# EAGLE board processing (EAGLE 6.5.0), part 1 of 2
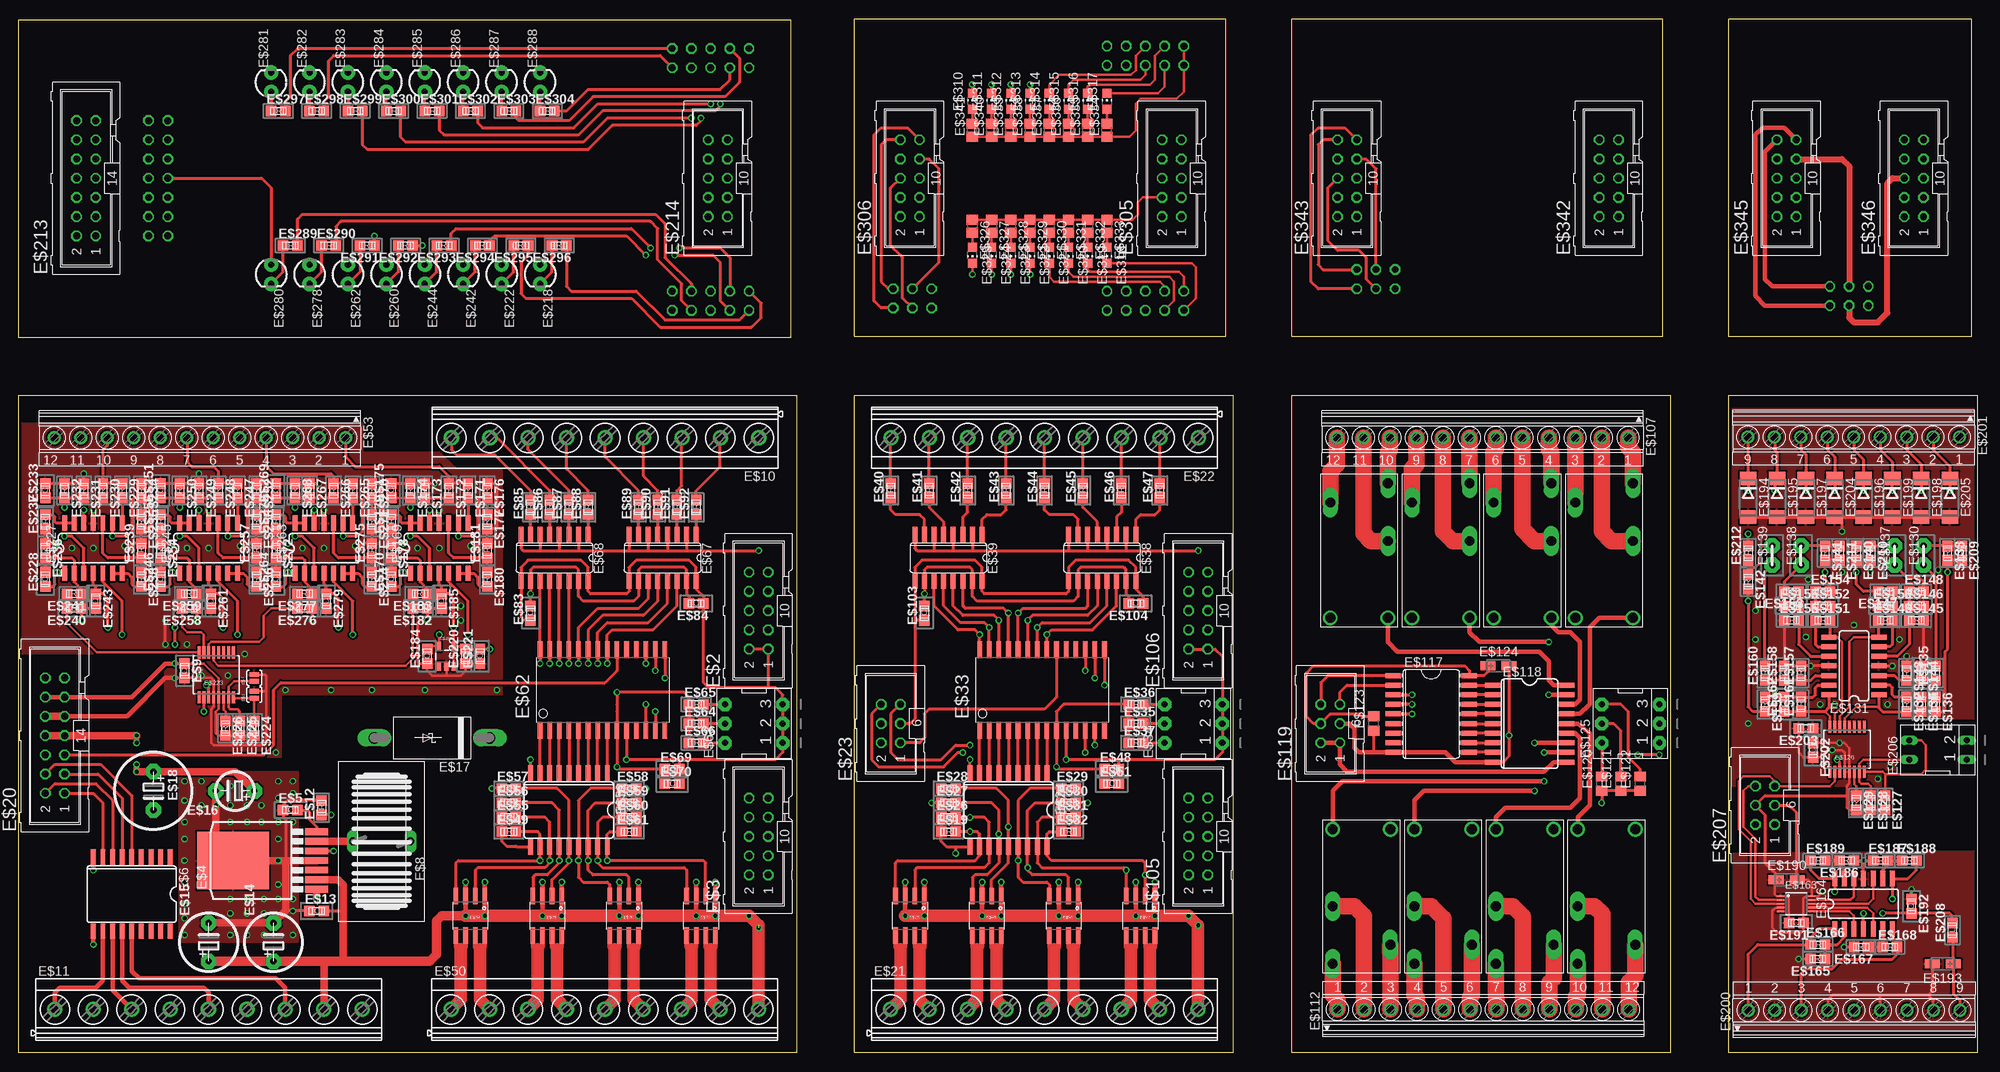
[diagram p0: board, top side]
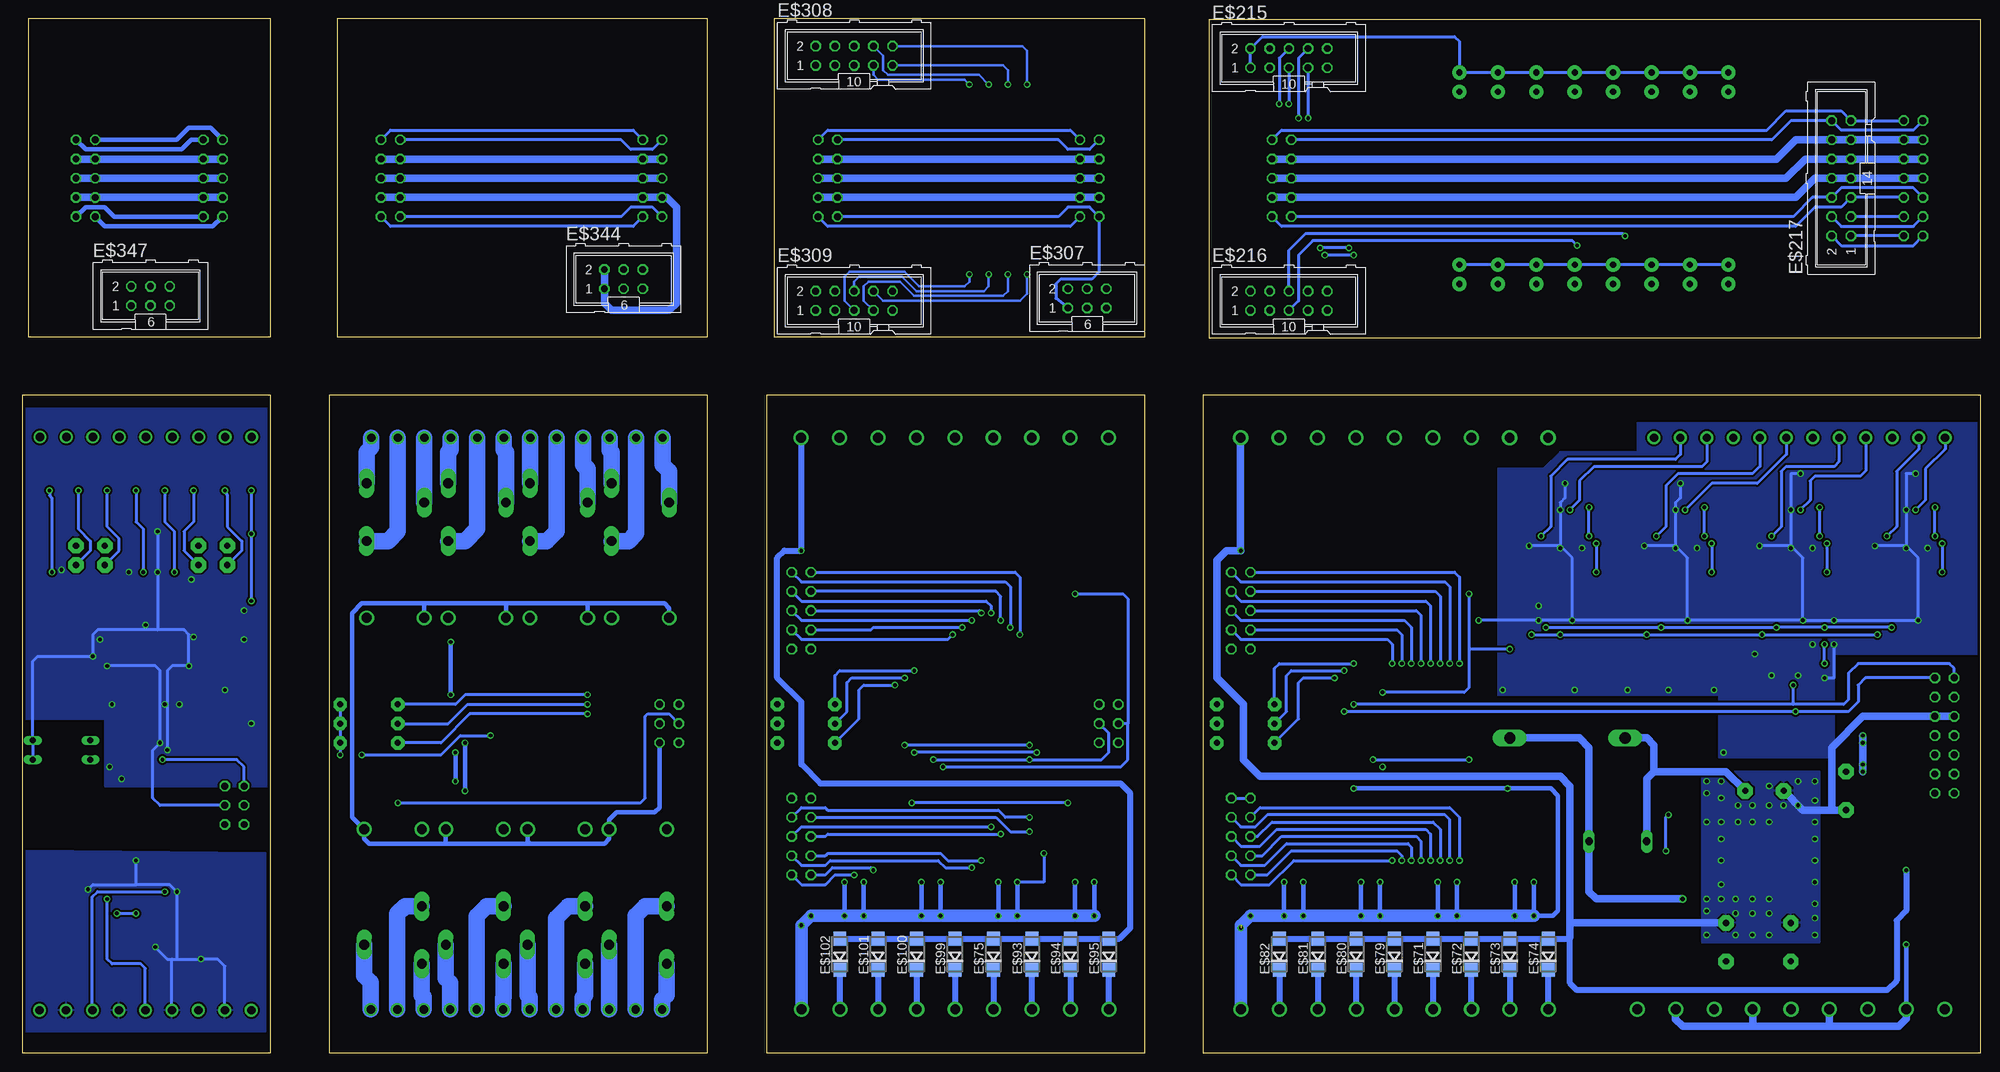
[diagram p1: board, bottom side, seen from below]

Size 258.85 x 136.63 mm. Coordinates in mm from the lower left corner, seen from the top.
Outline: 0,86.89 102.79,86.89 102.79,0 0,0 0,86.89
Outline: 110.49,86.89 160.5,86.89 160.5,0 110.49,0 110.49,86.89
Outline: 168.28,86.89 218.29,86.89 218.29,0 168.28,0 168.28,86.89
Outline: 226.06,86.89 258.85,86.89 258.85,0 226.06,0 226.06,86.89
Outline: 0,136.53 102.01,136.53 102.01,94.51 0,94.51 0,136.53
Outline: 110.49,136.63 159.49,136.63 159.49,94.61 110.49,94.61 110.49,136.63
Outline: 168.28,136.63 217.27,136.63 217.27,94.61 168.28,94.61 168.28,136.63
Outline: 226.06,94.61 226.06,136.63 258.06,136.63 258.06,94.61 226.06,94.61
Copper layers (1*16): Top 0.0356mm / dielectric 1.5011mm / Bottom 0.0356mm
Design rules "LaenPCBOrder": minimum track width 6mil, minimum drill 13mil, track to track 6mil, track to pad 6mil, pad to pad 6mil, via to via 6mil, smd to smd 6mil, copper to edge 15mil, drill to drill 6mil, minimum pad ring 7mil, minimum via ring 7mil, stop-mask expansion 3mil, vias tented up to drill 0mil, thermal gap 10mil

## Footprints (pad centres in the part's own frame; a part is rotated, then mirrored left to right if it is on the bottom)
SJ_2S-NO = smd 0.635 x 1.27: 1 -0.45,0; 2 0.45,0
ML10 = drill 0.914 octagon: 1 -5.08,-1.27; 2 -5.08,1.27; 3 -2.54,-1.27; 4 -2.54,1.27; 5 0,-1.27; 6 0,1.27; 7 2.54,-1.27; 8 2.54,1.27; 9 5.08,-1.27; 10 5.08,1.27
DDPACK-7 = smd 0.889 x 3.048: 1 -3.81,-8.255; 2 -2.54,-8.255; 3 -1.27,-8.255; 4 0,-8.255; 5 1.27,-8.255; 6 2.54,-8.255; 7 3.81,-8.255 | smd 7.62 x 9.525: P$1 0,2.794
C0805 = smd 1.397 x 1.397: 1 -0.953,0; 2 0.953,0
SO18L = smd 0.66 x 2.032: 1 -0.635,-4.902; 2 0.635,-4.902; 3 1.905,-4.902; 4 3.175,-4.902; 5 4.445,-4.902; 6 5.715,-4.902; 7 6.985,-4.902; 8 8.255,-4.902; 9 9.525,-4.902; 10 9.525,4.902; 11 8.255,4.902; 12 6.985,4.902; 13 5.715,4.902; 14 4.445,4.902; 15 3.175,4.902; 16 1.905,4.902; 17 0.635,4.902; 18 -0.635,4.902
KM3.0 = drill 1.016 long: 1 -3.81,0; 2 3.81,0
MKDSN1,5/9-5,08 = drill 1.3 pad 2: 1 -20.341,0.025; 2 -15.261,0.025; 3 -10.181,0.025; 4 -5.101,0.025; 5 -0.021,0.025; 6 5.059,0.025; 7 10.139,0.025; 8 15.219,0.025; 9 20.299,0.025
R0805 = smd 1.397 x 1.397: 1 -0.953,0; 2 0.953,0
CE02D = drill 0.813 pad 2.032 octagon: + -2.54,0; - 2.54,0
CE02C = drill 0.813 pad 2.032 octagon: + -2.54,0; - 2.54,0
DO201T15 = drill 1.499 long: A 7.62,0; C -7.62,0
CE02A = drill 0.813 pad 2.032 octagon: + -2.54,0; - 2.54,0
ML14 = drill 0.914 octagon: 1 -7.62,-1.27; 2 -7.62,1.27; 3 -5.08,-1.27; 4 -5.08,1.27; 5 -2.54,-1.27; 6 -2.54,1.27; 7 0,-1.27; 8 0,1.27; 9 2.54,-1.27; 10 2.54,1.27; 11 5.08,-1.27; 12 5.08,1.27; 13 7.62,-1.27; 14 7.62,1.27
ML6 = drill 0.914 octagon: 1 -2.54,-1.27; 2 -2.54,1.27; 3 0,-1.27; 4 0,1.27; 5 2.54,-1.27; 6 2.54,1.27
SOIC8 = smd 0.61 x 2.21: 1 -1.905,-2.616; 2 -0.635,-2.616; 3 0.635,-2.616; 4 1.905,-2.616; 5 1.905,2.616; 6 0.635,2.616; 7 -0.635,2.616; 8 -1.905,2.616
SO28-3 = smd 0.61 x 2.21: 1 -8.255,-5.315; 2 -6.985,-5.315; 3 -5.715,-5.315; 4 -4.445,-5.315; 5 -3.175,-5.315; 6 -1.905,-5.315; 7 -0.635,-5.315; 8 0.635,-5.315; 9 1.905,-5.315; 10 3.175,-5.315; 11 4.445,-5.315; 12 5.715,-5.315; 13 6.985,-5.315; 14 8.255,-5.315; 15 8.255,5.315; 16 6.985,5.315; 17 5.715,5.315; 18 4.445,5.315; 19 3.175,5.315; 20 1.905,5.315; 21 0.635,5.315; 22 -0.635,5.315; 23 -1.905,5.315; 24 -3.175,5.315; 25 -4.445,5.315; 26 -5.715,5.315; 27 -6.985,5.315; 28 -8.255,5.315
EPG-03-SMALL = drill 0.813 pad 1.778 octagon: 1 -2.54,-3.81; 2 0,-3.81; 3 2.54,-3.81; 4 2.54,3.81; 5 0,3.81; 6 -2.54,3.81
SO16 = smd 0.66 x 2.032: 1 -4.445,-3.073; 2 -3.175,-3.073; 3 -1.905,-3.073; 4 -0.635,-3.073; 5 0.635,-3.073; 6 1.905,-3.073; 7 3.175,-3.073; 8 4.445,-3.073; 9 4.445,3.073; 10 3.175,3.073; 11 1.905,3.073; 12 0.635,3.073; 13 -0.635,3.073; 14 -1.905,3.073; 15 -3.175,3.073; 16 -4.445,3.073
175317 = drill 1.1 pad 1.7: 1 -13.973,0; 2 -10.473,0; 3 -6.973,0; 4 -3.473,0; 5 0.028,0; 6 3.527,0; 7 7.027,0; 8 10.527,0; 9 14.027,0; 19 17.527,0; 20 21.027,0; 21 24.527,0
DO214AC = smd 1.8 x 1.7: A 2.05,0; C -2.05,0
ALQ = drill 1.3: P$1 0,3.81; P$2 0,-3.81 | drill 1.3 pad 1.676 long: P$3 10.16,-3.81; P$4 17.78,-3.81; P$5 15.24,3.81
SO18W = smd 0.66 x 2.032: 1 -5.08,-5.029; 2 -3.81,-5.029; 3 -2.54,-5.029; 4 -1.27,-5.029; 5 0,-5.029; 6 1.27,-5.029; 7 2.54,-5.029; 8 3.81,-5.029; 9 5.08,-5.029; 10 5.08,5.029; 11 3.81,5.029; 12 2.54,5.029; 13 1.27,5.029; 14 0,5.029; 15 -1.27,5.029; 16 -2.54,5.029; 17 -3.81,5.029; 18 -5.08,5.029
R0805' = smd 1.3 x 1.5: 1 -0.95,0; 2 0.95,0
CT3216 = smd 2 x 1.2: + -1.4,0; - 1.4,0
TSSOP16 = smd 0.4 x 1.6: 1 -2.225,-2.85; 2 -1.575,-2.85; 3 -0.925,-2.85; 4 -0.275,-2.85; 5 0.375,-2.85; 6 1.025,-2.85; 7 1.675,-2.85; 8 2.325,-2.85; 9 2.325,3.05; 10 1.675,3.05; 11 1.025,3.05; 12 0.375,3.05; 13 -0.275,3.05; 14 -0.925,3.05; 15 -1.575,3.05; 16 -2.225,3.05
J01N = drill 0.813 pad 2.032 octagon: 1 -1.27,0; 2 1.27,0
SOIC-14 = smd 0.66 x 2.032: 1 -4.445,-3.315; 2 -3.175,-3.315; 3 -1.905,-3.315; 4 -0.635,-3.315; 5 0.635,-3.315; 6 1.905,-3.315; 7 3.175,-3.315; 8 3.175,3.315; 9 1.905,3.315; 10 0.635,3.315; 11 -0.635,3.315; 12 -1.905,3.315; 13 -3.175,3.315; 14 -4.445,3.315
MSOP10 = smd 0.3 x 1: 1 -1,-2.05; 2 -0.5,-2.05; 3 0,-2.05; 4 0.5,-2.05; 5 1,-2.05; 6 1,2.05; 7 0.5,2.05; 8 0,2.05; 9 -0.5,2.05; 10 -1,2.05
DO214AA = smd 1.8 x 2.2: A 2.55,0; C -2.55,0
1751316 = drill 1.1 pad 1.7: 1 -13.973,-0.1; 2 -10.473,-0.1; 3 -6.973,-0.1; 4 -3.473,-0.1; 5 0.028,-0.1; 6 3.527,-0.1; 7 7.027,-0.1; 8 10.527,-0.1; 9 14.027,-0.1
EPG-02 = drill 0.813 long: 1 -1.27,-3.81; 2 1.27,-3.81; 3 1.27,3.81; 4 -1.27,3.81
L0805 = smd 1.397 x 1.397: 1 -0.953,0; 2 0.953,0
LED3MM = drill 0.813 pad 1.88: A -1.27,0; K 1.27,0
SOT23-5 = smd 0.55 x 1.2: 1 -0.95,-1.3; 2 0,-1.3; 3 0.95,-1.3; 4 0.95,1.3; 5 -0.95,1.3
CHIP-LED0805 = smd 1.2 x 1.2: A 0,-1.05; C 0,1.05
R0805'' = smd 1.3 x 1.5: 1 -0.85,0; 2 0.85,0

## Placement (x,y rotation side)
E$1  [SJ_2S-NO]  31.11,47.31 90 top
E$2  [ML10]  97.79,58.42 90 top
E$3  [ML10]  97.79,28.57 90 top
E$4  LM2673  [DDPACK-7]  31.11,25.4 90 top
E$5  100n  [C0805]  35.88,32.07 0 top
E$6  ULN2803  [SO18L]  19.37,20.95 180 top
E$7  [SJ_2S-NO]  31.11,49.53 90 top
E$8  [KM3.0]  47.94,27.94 180 top
E$9  100n  [C0805]  21.91,50.48 270 top
E$10  [MKDSN1,5/9-5,08]  77.47,81.28 180 top
E$11  [MKDSN1,5/9-5,08]  25.08,5.71 0 top
E$12  10K  [R0805]  40.01,32.38 90 top
E$13  100n  [C0805]  39.37,18.73 0 top
E$14  [CE02D]  33.66,14.61 90 top
E$15  [CE02D]  25.08,14.61 90 top
E$16  [CE02C]  28.57,34.61 180 top
E$17  [DO201T15]  54.61,41.59 180 top
E$18  [CE02A]  17.78,34.61 270 top
E$19  10K  [R0805]  122.87,29.21 0 top
E$20  [ML14]  4.76,41.91 90 top
E$21  [MKDSN1,5/9-5,08]  135.57,5.71 0 top
E$22  [MKDSN1,5/9-5,08]  135.57,81.28 180 top
E$23  [ML6]  115.25,43.5 90 top
E$24  ULN2803  [SO18L]  135.25,32.07 180 top
E$25  [SOIC8]  117.79,18.1 180 top
E$26  10K  [R0805]  122.87,31.11 0 top
E$27  10K  [R0805]  122.87,33.02 0 top
E$28  10K  [R0805]  122.87,34.92 0 top
E$29  10K  [R0805]  138.75,34.92 0 top
E$30  10K  [R0805]  138.75,33.02 0 top
E$31  10K  [R0805]  138.75,31.11 0 top
E$32  10K  [R0805]  138.75,29.21 0 top
E$33  MCP23017  [SO28-3]  135.25,47.94 0 top
E$34  [EPG-03-SMALL]  155.26,43.5 90 top
E$35  10K  [R0805]  147.64,43.5 0 top
E$36  10K  [R0805]  147.64,46.04 0 top
E$37  10K  [R0805]  147.64,40.96 0 top
E$38  ACSL-6400  [SO16]  143.19,65.41 180 top
E$39  ACSL-6400  [SO16]  122.87,65.41 180 top
E$40  1.30K  [R0805]  115.25,74.3 90 top
E$41  1.30K  [R0805]  120.33,74.3 90 top
E$42  1.30K  [R0805]  125.41,74.3 90 top
E$43  1.30K  [R0805]  130.49,74.3 90 top
E$44  1.30K  [R0805]  135.57,74.3 90 top
E$45  1.30K  [R0805]  140.65,74.3 90 top
E$46  1.30K  [R0805]  145.73,74.3 90 top
E$47  1.30K  [R0805]  150.81,74.3 90 top
E$48  100n  [C0805]  144.46,37.47 0 top
E$49  10K  [R0805]  64.77,29.21 0 top
E$50  [MKDSN1,5/9-5,08]  77.47,5.71 0 top
E$51  1u  [C0805]  144.46,35.56 0 top
E$52  ULN2803  [SO18L]  77.15,32.07 180 top
E$53  [175317]  29.21,81.28 180 top
E$54  [SOIC8]  59.69,18.1 180 top
E$55  10K  [R0805]  64.77,31.11 0 top
E$56  10K  [R0805]  64.77,33.02 0 top
E$57  10K  [R0805]  64.77,34.92 0 top
E$58  10K  [R0805]  80.64,34.92 0 top
E$59  10K  [R0805]  80.64,33.02 0 top
E$60  10K  [R0805]  80.64,31.11 0 top
E$61  10K  [R0805]  80.64,29.21 0 top
E$62  MCP23017  [SO28-3]  77.15,47.94 0 top
E$63  [EPG-03-SMALL]  97.16,43.5 90 top
E$64  10K  [R0805]  89.53,43.5 0 top
E$65  10K  [R0805]  89.53,46.04 0 top
E$66  10K  [R0805]  89.53,40.96 0 top
E$67  ACSL-6400  [SO16]  85.09,65.41 180 top
E$68  ACSL-6400  [SO16]  70.8,65.41 180 top
E$69  100n  [C0805]  86.36,37.47 0 top
E$70  1u  [C0805]  86.36,35.56 0 top
E$71  [DO214AC]  72.39,13.02 90 bottom
E$72  [DO214AC]  67.31,13.02 90 bottom
E$73  [DO214AC]  62.23,13.02 90 bottom
E$74  [DO214AC]  57.15,13.02 90 bottom
E$75  [DO214AC]  130.49,13.02 90 bottom
E$76  [SOIC8]  80.01,18.1 180 top
E$77  [SOIC8]  90.17,18.1 180 top
E$78  [SOIC8]  69.85,18.1 180 top
E$79  [DO214AC]  77.47,13.02 90 bottom
E$80  [DO214AC]  82.55,13.02 90 bottom
E$81  [DO214AC]  87.63,13.02 90 bottom
E$82  [DO214AC]  92.71,13.02 90 bottom
E$83  100n  [C0805]  67.63,58.1 90 top
E$84  100n  [C0805]  89.53,59.37 180 top
E$85  1.30K  [R0805]  67.63,72.07 90 top
E$86  1.30K  [R0805]  70.17,72.07 90 top
E$87  1.30K  [R0805]  72.71,72.07 90 top
E$88  1.30K  [R0805]  75.25,72.07 90 top
E$89  1.30K  [R0805]  81.92,72.07 90 top
E$90  1.30K  [R0805]  84.45,72.07 90 top
E$91  1.30K  [R0805]  87,72.07 90 top
E$92  1.30K  [R0805]  89.53,72.07 90 top
E$93  [DO214AC]  125.41,13.02 90 bottom
E$94  [DO214AC]  120.33,13.02 90 bottom
E$95  [DO214AC]  115.25,13.02 90 bottom
E$96  [SOIC8]  138.11,18.1 180 top
E$97  [SOIC8]  148.27,18.1 180 top
E$98  [SOIC8]  127.95,18.1 180 top
E$99  [DO214AC]  135.57,13.02 90 bottom
E$100  [DO214AC]  140.65,13.02 90 bottom
E$101  [DO214AC]  145.73,13.02 90 bottom
E$102  [DO214AC]  150.81,13.02 90 bottom
E$103  100n  [C0805]  119.7,58.1 90 top
E$104  100n  [C0805]  147.64,59.37 180 top
E$105  [ML10]  155.89,28.57 90 top
E$106  [ML10]  155.89,58.42 90 top
E$107  [175317]  198.75,81.28 180 top
E$108  ALQ105  [ALQ]  187.96,57.47 90 top
E$109  ALQ105  [ALQ]  177.16,57.47 90 top
E$110  ALQ105  [ALQ]  209.55,57.47 90 top
E$111  ALQ105  [ALQ]  198.75,57.47 90 top
E$112  [175317]  188.28,5.71 0 top
E$113  ALQ105  [ALQ]  199.07,29.53 270 top
E$114  ALQ105  [ALQ]  209.87,29.53 270 top
E$115  ALQ105  [ALQ]  177.48,29.53 270 top
E$116  ALQ105  [ALQ]  188.28,29.53 270 top
E$117  MCP2308  [SO18W]  186.69,44.77 270 top
E$118  ULN2803  [SO18L]  199.71,47.94 270 top
E$119  [ML6]  173.35,43.5 90 top
E$120  10K  [R0805']  209.23,35.56 90 top
E$121  10K  [R0805']  211.77,35.56 90 top
E$122  10K  [R0805']  214.31,35.56 90 top
E$123  100n  [R0805']  179.07,43.5 90 top
E$124  10u  [CT3216]  195.58,51.12 0 top
E$125  [EPG-03-SMALL]  213.04,43.5 90 top
E$126  ADC128D818  [TSSOP16]  241.62,40.01 0 top
E$127  10K  [R0805]  246.7,33.02 270 top
E$128  10K  [R0805]  244.79,33.02 270 top
E$129  10K  [R0805]  242.89,33.02 270 top
E$130  [J01N]  251.78,65.72 90 top
E$131  LMV344  [SOIC-14]  242.57,51.75 90 top
E$132  25.5K  [R0805]  249.56,46.04 270 top
E$133  500  [R0805]  254.95,66.04 270 top
E$134  100n  [C0805]  251.46,46.04 270 top
E$135  102K  [R0805]  253.37,50.16 90 top
E$136  102K  [R0805]  253.37,46.04 270 top
E$137  [J01N]  247.97,65.72 90 top
E$138  [J01N]  235.59,65.72 90 top
E$139  [J01N]  231.78,65.72 90 top
E$140  500  [R0805]  242.89,66.04 270 top
E$141  500  [R0805]  238.76,66.04 270 top
E$142  500  [R0805]  228.6,62.23 270 top
E$143  25.5K  [R0805]  249.56,50.16 270 top
E$144  100n  [C0805]  251.46,50.16 270 top
E$145  25.5K  [R0805]  250.82,57.15 0 top
E$146  100n  [C0805]  250.82,59.05 0 top
E$147  102K  [R0805]  246.7,60.96 180 top
E$148  102K  [R0805]  250.82,60.96 0 top
E$149  25.5K  [R0805]  246.7,57.15 0 top
E$150  100n  [C0805]  246.7,59.05 0 top
E$151  25.5K  [R0805]  238.44,57.15 0 top
E$152  100n  [C0805]  238.44,59.05 0 top
E$153  102K  [R0805]  234.31,60.96 180 top
E$154  102K  [R0805]  238.44,60.96 0 top
E$155  25.5K  [R0805]  234.31,57.15 0 top
E$156  100n  [C0805]  234.31,59.05 0 top
E$157  25.5K  [R0805]  235.59,50.16 90 top
E$158  100n  [C0805]  233.36,50.16 90 top
E$159  102K  [R0805]  230.82,46.04 270 top
E$160  102K  [R0805]  230.82,50.16 90 top
E$161  25.5K  [R0805]  235.59,46.04 90 top
E$162  100n  [C0805]  233.36,46.04 90 top
E$163  MCP4728  [MSOP10]  234.95,19.68 270 top
E$164  OPA4171  [SOIC-14]  244.47,19.68 0 top
E$165  82.5K  [R0805]  237.81,12.38 180 top
E$166  330K  [R0805]  237.81,14.29 0 top
E$167  82.5K  [R0805]  243.52,13.97 180 top
E$168  330K  [R0805]  247.33,13.97 0 top
E$169  [SOIC-14]  56.2,66.67 0 top
E$170  0.1  [C0805]  49.21,62.55 90 top
E$171  1K  [R0805]  59.37,74.3 270 top
E$172  2K  [R0805]  56.83,74.3 270 top
E$173  2K  [R0805]  53.66,74.3 270 top
E$174  39.2K  [R0805]  51.75,74.3 270 top
E$175  0.1  [C0805]  49.21,74.3 90 top
E$176  1.91K  [R0805]  61.91,74.3 270 top
E$177  100  [R0805]  61.91,70.17 270 top
E$178  39.2K  [R0805]  49.21,66.36 270 top
E$179  1K  [R0805]  49.21,70.17 90 top
E$180  26.7K  [R0805]  61.91,62.55 270 top
E$181  1.1K  [R0805]  61.91,66.36 90 top
E$182  4.7n  [C0805]  53.02,58.74 180 top
E$183  51  [R0805]  53.02,60.64 180 top
E$184  0.1  [C0805]  53.98,52.39 90 top
E$185  0.1  [C0805]  55.88,59.69 270 top
E$186  82.5K  [R0805]  241.62,25.4 180 top
E$187  82.5K  [R0805]  246.06,25.4 0 top
E$188  330K  [R0805]  249.87,25.4 0 top
E$189  330K  [R0805]  237.81,25.4 0 top
E$190  10u  [CT3216]  233.68,22.86 0 top
E$191  100n  [C0805]  234.95,17.14 180 top
E$192  100n  [C0805]  250.19,19.37 270 top
E$193  10u  [CT3216]  254.32,11.75 180 top
E$194  1SMB30AT3G  [DO214AA]  228.6,73.34 270 top
E$195  [DO214AA]  232.41,73.34 270 top
E$196  1SMB30AT3G  [DO214AA]  243.84,73.34 270 top
E$197  1SMB30AT3G  [DO214AA]  236.22,73.34 270 top
E$198  1SMB30AT3G  [DO214AA]  251.46,73.34 270 top
E$199  1SMB30AT3G  [DO214AA]  247.65,73.34 270 top
E$200  [1751316]  242.57,5.71 0 top
E$201  [1751316]  242.57,81.28 180 top
E$202  100n  [C0805]  237.17,40.01 270 top
E$203  1u  [C0805]  236.22,42.86 180 top
E$204  1SMB30AT3G  [DO214AA]  240.03,73.34 270 top
E$205  1SMB30AT3G  [DO214AA]  255.27,73.34 270 top
E$206  [EPG-02]  253.68,40.01 90 top
E$207  [ML6]  230.82,32.7 90 top
E$208  10uH  [L0805]  255.59,16.19 90 top
E$209  500  [R0805]  256.86,66.04 270 top
E$210  500  [R0805]  244.79,66.04 270 top
E$211  500  [R0805]  240.66,66.04 270 top
E$212  500  [R0805]  228.6,66.04 90 top
E$213  [ML14]  8.89,115.57 90 top
E$214  [ML10]  92.39,115.57 90 top
E$215  [ML10]  91.44,131.44 0 bottom
E$216  [ML10]  91.44,99.38 0 bottom
E$217  [ML14]  18.41,115.57 90 bottom
E$218  [LED3MM]  68.9,102.87 270 top
E$219  [SOT23-5]  56.52,52.39 0 top
E$220  0.1  [C0805]  59.05,52.39 90 top
E$221  0.1  [C0805]  60.96,52.39 90 top
E$222  [LED3MM]  63.82,102.87 270 top
E$223  AD5316R  [TSSOP16]  26.04,49.85 0 top
E$224  10K  [R0805]  31.11,42.86 270 top
E$225  10K  [R0805]  29.21,42.86 270 top
E$226  10K  [R0805]  27.3,42.86 270 top
E$227  [SOIC-14]  10.48,66.67 0 top
E$228  0.1  [C0805]  3.49,62.55 90 top
E$229  1K  [R0805]  13.65,74.3 270 top
E$230  2K  [R0805]  11.11,74.3 270 top
E$231  2K  [R0805]  8.57,74.3 270 top
E$232  39.2K  [R0805]  6.03,74.3 270 top
E$233  0.1  [C0805]  3.49,74.3 90 top
E$234  1.91K  [R0805]  16.19,74.3 270 top
E$235  100  [R0805]  16.19,70.17 270 top
E$236  39.2K  [R0805]  3.49,66.36 270 top
E$237  1K  [R0805]  3.49,70.17 90 top
E$238  26.7K  [R0805]  16.19,62.55 270 top
E$239  1.1K  [R0805]  16.19,66.36 90 top
E$240  4.7n  [C0805]  7.3,58.74 180 top
E$241  51  [R0805]  7.3,60.64 180 top
E$242  [LED3MM]  58.74,102.87 270 top
E$243  0.1  [C0805]  10.16,59.69 270 top
E$244  [LED3MM]  53.66,102.87 270 top
E$245  [SOIC-14]  25.72,66.67 0 top
E$246  0.1  [C0805]  18.73,62.55 90 top
E$247  1K  [R0805]  28.89,74.3 270 top
E$248  2K  [R0805]  26.35,74.3 270 top
E$249  2K  [R0805]  23.81,74.3 270 top
E$250  39.2K  [R0805]  21.27,74.3 270 top
E$251  0.1  [C0805]  18.73,74.3 90 top
E$252  1.91K  [R0805]  31.43,74.3 270 top
E$253  100  [R0805]  31.43,70.17 270 top
E$254  39.2K  [R0805]  18.73,66.36 270 top
E$255  1K  [R0805]  18.73,70.17 90 top
E$256  26.7K  [R0805]  31.43,62.55 270 top
E$257  1.1K  [R0805]  31.43,66.36 90 top
E$258  4.7n  [C0805]  22.54,58.74 180 top
E$259  51  [R0805]  22.54,60.64 180 top
E$260  [LED3MM]  48.58,102.87 270 top
E$261  0.1  [C0805]  25.4,59.69 270 top
E$262  [LED3MM]  43.5,102.87 270 top
E$263  [SOIC-14]  40.96,66.67 0 top
E$264  0.1  [C0805]  33.97,62.55 90 top
E$265  1K  [R0805]  44.13,74.3 270 top
E$266  2K  [R0805]  41.59,74.3 270 top
E$267  2K  [R0805]  38.42,74.3 270 top
E$268  39.2K  [R0805]  36.51,74.3 270 top
E$269  0.1  [C0805]  33.97,74.3 90 top
E$270  1.91K  [R0805]  46.67,74.3 270 top
E$271  100  [R0805]  46.67,70.17 270 top
E$272  39.2K  [R0805]  33.97,66.36 270 top
E$273  1K  [R0805]  33.97,70.17 90 top
E$274  26.7K  [R0805]  46.67,62.55 270 top
E$275  1.1K  [R0805]  46.67,66.36 90 top
E$276  4.7n  [C0805]  37.78,58.74 180 top
E$277  51  [R0805]  37.78,60.64 180 top
E$278  [LED3MM]  38.42,102.87 270 top
E$279  0.1  [C0805]  40.64,59.69 270 top
E$280  [LED3MM]  33.34,102.87 270 top
E$281  [LED3MM]  33.34,128.27 90 top
E$282  [LED3MM]  38.42,128.27 90 top
E$283  [LED3MM]  43.5,128.27 90 top
E$284  [LED3MM]  48.58,128.27 90 top
E$285  [LED3MM]  53.66,128.27 90 top
E$286  [LED3MM]  58.74,128.27 90 top
E$287  [LED3MM]  63.82,128.27 90 top
E$288  [LED3MM]  68.9,128.27 90 top
E$289  470  [R0805]  35.88,106.68 0 top
E$290  470  [R0805]  40.96,106.68 0 top
E$291  470  [R0805]  46.04,106.68 180 top
E$292  470  [R0805]  51.12,106.68 180 top
E$293  470  [R0805]  56.2,106.68 180 top
E$294  470  [R0805]  61.28,106.68 180 top
E$295  470  [R0805]  66.36,106.68 180 top
E$296  470  [R0805]  71.44,106.68 180 top
E$297  470  [R0805]  34.29,124.46 0 top
E$298  470  [R0805]  39.37,124.46 0 top
E$299  470  [R0805]  44.45,124.46 0 top
E$300  470  [R0805]  49.53,124.46 0 top
E$301  470  [R0805]  54.61,124.46 0 top
E$302  470  [R0805]  59.69,124.46 0 top
E$303  470  [R0805]  64.77,124.46 0 top
E$304  470  [R0805]  69.85,124.46 0 top
E$305  [ML10]  152.4,115.57 90 top
E$306  [ML10]  117.79,115.57 90 top
E$307  [ML6]  118.11,99.69 0 bottom
E$308  [ML10]  148.91,131.76 0 bottom
E$309  [ML10]  148.91,99.38 0 bottom
E$310  [CHIP-LED0805]  126.05,125.73 0 top
E$311  [CHIP-LED0805]  128.59,125.73 0 top
E$312  [CHIP-LED0805]  131.13,125.73 0 top
E$313  [CHIP-LED0805]  133.67,125.73 0 top
E$314  [CHIP-LED0805]  136.21,125.73 0 top
E$315  [CHIP-LED0805]  138.75,125.73 0 top
E$316  [CHIP-LED0805]  141.29,125.73 0 top
E$317  [CHIP-LED0805]  143.83,125.73 0 top
E$318  [CHIP-LED0805]  143.83,105.41 180 top
E$319  [CHIP-LED0805]  141.29,105.41 180 top
E$320  [CHIP-LED0805]  138.75,105.41 180 top
E$321  [CHIP-LED0805]  136.21,105.41 180 top
E$322  [CHIP-LED0805]  133.67,105.41 180 top
E$323  [CHIP-LED0805]  131.13,105.41 180 top
E$324  [CHIP-LED0805]  128.59,105.41 180 top
E$325  [CHIP-LED0805]  126.05,105.41 180 top
E$326  [R0805'']  126.05,109.22 270 top
E$327  [R0805'']  128.59,109.22 270 top
E$328  [R0805'']  131.13,109.22 270 top
E$329  [R0805'']  133.67,109.22 270 top
E$330  [R0805'']  136.21,109.22 270 top
E$331  [R0805'']  138.75,109.22 270 top
E$332  [R0805'']  141.29,109.22 270 top
E$333  [R0805'']  143.83,109.22 270 top
E$334  [R0805'']  143.83,121.92 90 top
E$335  [R0805'']  141.29,121.92 90 top
E$336  [R0805'']  138.75,121.92 90 top
E$337  [R0805'']  136.21,121.92 90 top
E$338  [R0805'']  133.67,121.92 90 top
E$339  [R0805'']  131.13,121.92 90 top
E$340  [R0805'']  128.59,121.92 90 top
E$341  [R0805'']  126.05,121.92 90 top
E$342  [ML10]  210.19,115.57 90 top
E$343  [ML10]  175.58,115.57 90 top
E$344  [ML6]  179.39,102.23 0 bottom
E$345  [ML10]  233.68,115.57 90 top
E$346  [ML10]  250.51,115.57 90 top
E$347  [ML6]  241.94,100.01 0 bottom

## Library data of the parts
E$1 E$7 = SparkFun-Capacitors
E$2 E$3 E$20 E$23 E$105 E$106 E$119 E$207 E$213-E$217 E$305-E$309 E$342-E$347 = con-harting-ml
E$4 = texas
E$5 E$9 E$12-E$16 E$18 E$19 E$26-E$32 E$35-E$37 E$40-E$49 E$51 E$55-E$61 E$64-E$66 E$69 E$70 E$83-E$92 E$103 E$104 E$127-E$129 E$132-E$136 E$140-E$162 E$165-E$168 E$170-E$189 E$191 E$192 E$202 E$203 E$208-E$212 E$220 E$221 E$224-E$226 E$228-E$241 E$243 E$246-E$259 E$261 E$264-E$277 E$279 E$289-E$304 = divers
E$6 E$24 E$52 E$118 = SparkFun-PowerIC
E$8 = inductors
E$10 E$11 E$21 E$22 E$50 = con-phoenix-508
E$17 = ref-packages-longpad
E$25 E$54 E$76-E$78 E$96-E$98 E$126 E$131 E$164 E$223 = SparkFun-AnalogIC
E$33 E$62 = burr-brown
E$34 E$63 E$125 E$206 = special
E$38 E$39 E$67 E$68 = linear
E$53 E$107 E$112 E$200 E$201 = con-phoenix-350
E$71-E$75 E$79-E$82 E$93-E$95 E$99-E$102 E$120-E$124 E$190 E$193-E$199 E$204 E$205 = ref-packages
E$108-E$111 E$113-E$116 = relay
E$117 = uln-udn
E$130 E$137-E$139 = connectors
E$163 E$169 E$219 E$227 E$245 E$263 = SparkFun-DigitalIC
E$218 E$222 E$242 E$244 E$260 E$262 E$278 E$280-E$288 = SparkFun-LED
E$310-E$325 = led
E$326-E$341 = resistor

## Nets
3V1: E$117.18 E$119.4 E$120.1 E$121.1 E$122.1 E$123.2 E$124.+
3V2: E$342.7 E$342.8 E$343.7 E$343.8 E$344.4
3V3: E$23.4 E$33.9 E$35.1 E$36.1 E$37.1 E$38.10 E$38.15 E$39.10 E$39.15 E$48.1 E$51.1 E$103.2 E$104.2
3V4: E$345.7 E$345.8 E$346.7 E$346.8 E$347.4
5V: E$108.P$1 E$109.P$1 E$110.P$1 E$111.P$1 E$113.P$1 E$114.P$1 E$115.P$1 E$116.P$1 E$118.10 E$119.1 E$119.2
5V1: E$345.3 E$345.4 E$346.3 E$346.4
+5V: E$4.6 E$8.2 E$16.+ E$17.A E$18.+ E$20.7 E$20.8
GND: E$1.2 E$2.1 E$2.2 E$4.4 E$4.P$1 E$5.1 E$6.9 E$7.2 E$9.2 E$10.1 E$12.2 E$13.1 E$14.- E$15.- E$16.- E$18.- E$20.9 E$20.10 E$52.9 E$62.10 E$63.1 E$63.2 E$63.3 E$67.2 E$67.4 E$67.6 E$67.8 E$67.9 E$67.16 E$68.2 E$68.4 E$68.6 E$68.8 E$68.9 E$68.16 E$69.2 E$70.2 E$71.A E$72.A E$73.A E$74.A E$79.A E$80.A E$81.A E$82.A E$83.1 E$84.1 E$169.11 E$173.1 E$174.1 E$175.2 E$176.1 E$177.2 E$181.2 E$182.1 E$184.1 E$185.2 E$219.2 E$220.1 E$221.1 E$223.4 E$227.11 E$231.1 E$232.1 E$233.2 E$234.1 E$235.2 E$239.2 E$240.1 E$243.2 E$245.11 E$249.1 E$250.1 E$251.2 E$252.1 E$253.2 E$257.2 E$258.1 E$261.2 E$263.11 E$267.1 E$268.1 E$269.2 E$270.1 E$271.2 E$275.2 E$276.1 E$279.2
GND1: E$23.3 E$24.9 E$33.10 E$34.1 E$34.2 E$34.3 E$38.9 E$38.16 E$39.9 E$39.16 E$48.2 E$51.2 E$103.1 E$104.1 E$106.1 E$106.2
GND2: E$117.9 E$118.9 E$119.3 E$123.1 E$124.- E$125.1 E$125.2 E$125.3
GND3: E$126.4 E$126.5 E$127.2 E$128.2 E$129.2 E$131.4 E$131.11 E$143.1 E$144.1 E$145.2 E$146.2 E$155.1 E$156.1 E$157.2 E$158.2 E$163.1 E$163.4 E$163.10 E$164.11 E$165.2 E$167.2 E$186.1 E$187.1 E$190.+ E$190.- E$191.1 E$191.2 E$192.1 E$193.- E$194.A E$195.A E$196.A E$197.A E$198.A E$199.A E$200.2 E$200.4 E$200.6 E$200.8 E$202.1 E$202.2 E$203.1 E$203.2 E$204.A E$205.A E$206.1 E$206.2 E$207.3 E$207.4
GND4: E$342.5 E$342.6 E$343.5 E$343.6 E$344.3
GND5: E$345.5 E$345.6 E$346.5 E$346.6 E$347.3
IN1+: E$139.1 E$160.2 E$195.C E$201.8
IN1-: E$142.2 E$159.2 E$194.C E$201.9 E$212.2
IN2+: E$138.1 E$153.2 E$197.C E$201.7
IN2-: E$141.2 E$154.2 E$201.6 E$204.C E$211.2
IN3+: E$137.1 E$148.2 E$199.C E$201.4
IN3-: E$140.2 E$147.2 E$196.C E$201.5 E$210.2
IN4+: E$130.1 E$135.2 E$198.C E$201.3
IN4-: E$133.2 E$136.2 E$201.2 E$205.C E$209.2
INT1: E$23.1 E$33.20
POWER_GND: E$22.1 E$38.2 E$38.4 E$38.6 E$38.8 E$39.2 E$39.4 E$39.6 E$39.8 E$75.A E$93.A E$94.A E$95.A E$99.A E$100.A E$101.A E$102.A
S$8: E$10.9 E$85.2
S$11: E$53.1 E$171.1 E$172.1
S$26: E$6.11 E$11.1
S$27: E$6.12 E$11.3
S$28: E$6.13 E$11.5
S$29: E$6.14 E$11.7
S$34: E$1.1 E$223.8 E$224.1
S$35: E$6.6 E$20.3
S$36: E$6.5 E$20.4
S$37: E$6.7 E$20.2
S$38: E$6.8 E$20.1
S$39: E$10.8 E$86.2
S$40: E$10.7 E$87.2
S$41: E$10.6 E$88.2
S$42: E$10.5 E$89.2
S$43: E$10.4 E$90.2
S$44: E$10.3 E$91.2
S$45: E$10.2 E$92.2
S$46: E$68.7 E$85.1
S$81: E$4.2 E$6.10 E$11.2 E$11.4 E$11.6 E$11.8 E$13.2 E$14.+ E$15.+ E$49.1 E$50.9 E$52.10 E$54.1 E$54.3 E$55.1 E$56.1 E$57.1 E$58.2 E$59.2 E$60.2 E$61.2 E$76.1 E$76.3 E$77.1 E$77.3 E$78.1 E$78.3
S$82: E$4.1 E$8.1 E$17.C
S$83: E$4.7 E$5.2
S$85: E$4.5 E$12.1
S$99: E$169.8 E$171.2
S$102: E$169.6 E$169.7 E$180.2
S$105: E$53.2 E$169.9 E$176.2 E$177.1
S$108: E$169.1 E$170.1 E$178.1 E$179.1
S$114: E$169.2 E$170.2 E$178.2 E$183.1
S$120: E$169.13 E$169.14 E$179.2
S$126: E$169.10 E$180.1 E$181.1
S$132: E$169.3 E$172.2 E$173.2 E$174.2 E$175.1
S$133: E$53.3 E$169.12
S$134: E$182.2 E$183.2 E$223.13
S$145: E$3.9 E$3.10
S$151: E$169.5 E$184.2 E$219.5 E$227.5 E$245.5 E$263.5
S$152: E$3.8 E$49.2 E$52.11 E$54.4
S$153: E$3.7 E$52.12 E$54.2 E$55.2
S$155: E$19.2 E$24.11 E$25.4 E$105.8
S$156: E$24.12 E$25.2 E$26.2 E$105.7
S$157: E$24.13 E$27.2 E$98.4 E$105.6
S$158: E$3.6 E$52.13 E$56.2 E$78.4
S$159: E$3.5 E$52.14 E$57.2 E$78.2
S$160: E$3.4 E$52.15 E$58.1 E$76.4
S$162: E$3.3 E$52.16 E$59.1 E$76.2
S$163: E$3.2 E$52.17 E$60.1 E$77.4
S$164: E$3.1 E$52.18 E$61.1 E$77.2
S$165: E$24.14 E$28.2 E$98.2 E$105.5
S$166: E$52.8 E$62.1
S$167: E$52.7 E$62.2
S$168: E$52.6 E$62.3
S$169: E$52.5 E$62.4
S$170: E$52.4 E$62.5
S$171: E$52.3 E$62.6
S$172: E$52.2 E$62.7
S$173: E$52.1 E$62.8
S$174: E$24.15 E$29.1 E$96.4 E$105.4
S$178: E$24.16 E$30.1 E$96.2 E$105.3
S$180: E$24.17 E$31.1 E$97.4 E$105.2
S$182: E$2.10 E$62.28 E$68.11
S$183: E$2.9 E$62.27 E$68.12
S$184: E$2.8 E$62.26 E$68.13
S$185: E$2.7 E$62.25 E$68.14
S$186: E$2.6 E$62.24 E$67.11
S$187: E$2.5 E$62.23 E$67.12
S$188: E$2.4 E$62.22 E$67.13
S$189: E$2.3 E$62.21 E$67.14
S$190: E$20.5 E$62.20
S$191: E$62.17 E$63.4 E$65.2
S$192: E$62.16 E$63.5 E$64.2
S$193: E$62.15 E$63.6 E$66.2
S$194: E$50.1 E$54.5 E$54.6 E$74.C
S$195: E$53.19 E$229.1 E$230.1
S$196: E$227.8 E$229.2
S$197: E$227.6 E$227.7 E$238.2
S$198: E$53.20 E$227.9 E$234.2 E$235.1
S$199: E$227.1 E$228.1 E$236.1 E$237.1
S$200: E$227.2 E$228.2 E$236.2 E$241.1
S$201: E$227.13 E$227.14 E$237.2
S$202: E$227.10 E$238.1 E$239.1
S$203: E$50.2 E$54.7 E$54.8 E$73.C
S$204: E$227.3 E$230.2 E$231.2 E$232.2 E$233.1
S$205: E$53.21 E$227.12
S$206: E$223.16 E$240.2 E$241.2
S$207: E$50.5 E$76.5 E$76.6 E$79.C
S$208: E$50.6 E$76.7 E$76.8 E$80.C
S$209: E$53.7 E$247.1 E$248.1
S$210: E$245.8 E$247.2
S$211: E$245.6 E$245.7 E$256.2
S$212: E$53.8 E$245.9 E$252.2 E$253.1
S$213: E$245.1 E$246.1 E$254.1 E$255.1
S$214: E$245.2 E$246.2 E$254.2 E$259.1
S$215: E$245.13 E$245.14 E$255.2
S$216: E$245.10 E$256.1 E$257.1
S$217: E$50.7 E$77.5 E$77.6 E$81.C
S$218: E$245.3 E$248.2 E$249.2 E$250.2 E$251.1
S$219: E$53.9 E$245.12
S$220: E$223.15 E$258.2 E$259.2
S$221: E$50.8 E$77.7 E$77.8 E$82.C
S$222: E$50.3 E$72.C E$78.5 E$78.6
S$223: E$53.4 E$265.1 E$266.1
S$224: E$263.8 E$265.2
S$225: E$263.6 E$263.7 E$274.2
S$226: E$53.5 E$263.9 E$270.2 E$271.1
S$227: E$263.1 E$264.1 E$272.1 E$273.1
S$228: E$263.2 E$264.2 E$272.2 E$277.1
S$229: E$263.13 E$263.14 E$273.2
S$230: E$263.10 E$274.1 E$275.1
S$231: E$223.6 E$226.1
S$232: E$263.3 E$266.2 E$267.2 E$268.2 E$269.1
S$233: E$53.6 E$263.12
S$234: E$223.14 E$276.2 E$277.2
S$235: E$7.1 E$223.7 E$225.1
S$236: E$50.4 E$71.C E$78.7 E$78.8
S$237: E$24.18 E$32.1 E$97.2 E$105.1
S$238: E$19.1 E$21.9 E$24.10 E$25.1 E$25.3 E$26.1 E$27.1 E$28.1 E$29.2 E$30.2 E$31.2 E$32.2 E$96.1 E$96.3 E$97.1 E$97.3 E$98.1 E$98.3
S$239: E$24.8 E$33.1
S$240: E$68.5 E$86.1
S$241: E$68.3 E$87.1
S$242: E$68.1 E$88.1
S$243: E$67.7 E$89.1
S$244: E$67.5 E$90.1
S$245: E$67.3 E$91.1
S$246: E$67.1 E$92.1
S$247: E$24.7 E$33.2
S$248: E$24.6 E$33.3
S$249: E$24.5 E$33.4
S$250: E$24.4 E$33.5
S$251: E$24.3 E$33.6
S$252: E$24.2 E$33.7
S$253: E$24.1 E$33.8
S$255: E$22.9 E$40.2
S$256: E$22.8 E$41.2
S$257: E$22.7 E$42.2
S$258: E$22.6 E$43.2
S$259: E$22.5 E$44.2
S$260: E$22.4 E$45.2
S$261: E$22.3 E$46.2
S$262: E$22.2 E$47.2
S$263: E$33.28 E$39.11 E$106.10
S$264: E$33.27 E$39.12 E$106.9
S$265: E$33.26 E$39.13 E$106.8
S$266: E$33.25 E$39.14 E$106.7
S$267: E$33.24 E$38.11 E$106.6
S$268: E$33.23 E$38.12 E$106.5
S$269: E$33.22 E$38.13 E$106.4
S$270: E$33.21 E$38.14 E$106.3
S$271: E$33.17 E$34.4 E$36.2
S$272: E$33.16 E$34.5 E$35.2
S$273: E$33.15 E$34.6 E$37.2
S$274: E$21.1 E$25.5 E$25.6 E$95.C
S$275: E$21.2 E$25.7 E$25.8 E$94.C
S$276: E$21.5 E$96.5 E$96.6 E$99.C
S$277: E$21.6 E$96.7 E$96.8 E$100.C
S$278: E$21.7 E$97.5 E$97.6 E$101.C
S$279: E$21.8 E$97.7 E$97.8 E$102.C
S$280: E$21.3 E$93.C E$98.5 E$98.6
S$281: E$21.4 E$75.C E$98.7 E$98.8
S$283: E$39.7 E$40.1
S$284: E$39.5 E$41.1
S$285: E$39.3 E$42.1
S$286: E$39.1 E$43.1
S$287: E$38.7 E$44.1
S$288: E$38.5 E$45.1
S$289: E$38.3 E$46.1
S$290: E$38.1 E$47.1
S$313: E$107.21 E$109.P$5
S$314: E$107.20 E$109.P$3
S$315: E$107.19 E$109.P$4
S$316: E$107.8 E$108.P$3
S$317: E$107.6 E$111.P$5
S$318: E$107.5 E$111.P$3
S$319: E$107.3 E$110.P$5
S$320: E$107.2 E$110.P$3
S$321: E$107.9 E$108.P$5
S$322: E$107.7 E$108.P$4
S$323: E$107.4 E$111.P$4
S$324: E$107.1 E$110.P$4
S$337: E$112.21 E$114.P$5
S$338: E$112.20 E$114.P$3
S$339: E$112.19 E$114.P$4
S$340: E$112.8 E$113.P$3
S$341: E$112.6 E$116.P$5
S$342: E$112.5 E$116.P$3
S$343: E$112.3 E$115.P$5
S$344: E$112.2 E$115.P$3
S$345: E$112.9 E$113.P$5
S$346: E$112.7 E$113.P$4
S$347: E$112.4 E$116.P$4
S$348: E$112.1 E$115.P$4
S$361: E$117.17 E$118.1
S$362: E$117.16 E$118.2
S$363: E$117.15 E$118.3
S$364: E$117.14 E$118.4
S$365: E$117.13 E$118.5
S$366: E$117.12 E$118.6
S$367: E$117.11 E$118.7
S$368: E$117.10 E$118.8
S$369: E$109.P$2 E$118.18
S$370: E$108.P$2 E$118.17
S$371: E$111.P$2 E$118.16
S$372: E$110.P$2 E$118.15
S$373: E$114.P$2 E$118.14
S$374: E$113.P$2 E$118.13
S$375: E$116.P$2 E$118.12
S$376: E$115.P$2 E$118.11
S$377: E$117.3 E$122.2 E$125.4
S$378: E$117.4 E$121.2 E$125.5
S$379: E$117.5 E$120.2 E$125.6
S$402: E$126.6 E$129.1
S$403: E$126.7 E$128.1 E$206.4
S$404: E$126.8 E$127.1 E$206.3
S$405: E$130.2 E$133.1 E$209.1
S$406: E$131.2 E$132.1 E$134.1 E$136.1
S$407: E$131.6 E$147.1 E$149.2 E$150.2
S$408: E$126.13 E$131.1 E$132.2 E$134.2
S$409: E$131.5 E$145.1 E$146.1 E$148.1
S$410: E$138.2 E$141.1 E$211.1
S$411: E$137.2 E$140.1 E$210.1
S$412: E$131.3 E$135.1 E$143.2 E$144.2
S$413: E$126.14 E$131.7 E$149.1 E$150.1
S$414: E$131.9 E$151.1 E$152.1 E$154.1
S$415: E$131.13 E$159.1 E$161.2 E$162.2
S$416: E$126.15 E$131.8 E$151.2 E$152.2
S$417: E$131.12 E$157.1 E$158.1 E$160.1
S$418: E$131.10 E$153.1 E$155.2 E$156.2
S$419: E$126.16 E$131.14 E$161.1 E$162.1
S$420: E$163.6 E$164.3
S$421: E$163.7 E$164.5
S$422: E$163.9 E$164.12
S$423: E$163.8 E$164.10
S$424: E$164.2 E$165.1 E$166.2
S$425: E$164.1 E$166.1 E$200.1
S$426: E$164.7 E$168.2 E$200.3
S$427: E$164.13 E$186.2 E$189.2
S$428: E$164.9 E$187.2 E$188.1
S$429: E$164.14 E$189.1 E$200.7
S$430: E$164.8 E$188.2 E$200.5
S$432: E$139.2 E$142.1 E$212.1
S$433: E$126.2 E$163.3 E$207.5
S$434: E$164.6 E$167.1 E$168.1
S$435: E$193.+ E$200.9 E$208.1
S$509: E$213.11 E$213.12 E$214.7 E$214.8 E$217.11 E$217.12
S$510: E$213.9 E$213.10 E$214.5 E$214.6 E$217.9 E$217.10
S$511: E$213.6 E$214.2 E$217.6
S$512: E$213.5 E$214.1 E$217.5
S$513: E$213.4 E$217.4
S$514: E$213.3 E$217.3
S$515: E$213.2 E$217.2
S$516: E$213.1 E$217.1
S$517: E$213.7 E$213.8 E$214.3 E$214.4 E$217.7 E$217.8 E$218.A E$222.A E$242.A E$244.A E$260.A E$262.A E$278.A E$280.A
S$518: E$280.K E$289.1
S$519: E$216.8 E$289.2
S$520: E$278.K E$290.1
S$521: E$216.7 E$290.2
S$522: E$262.K E$291.2
S$523: E$260.K E$292.2
S$524: E$216.6 E$291.1
S$525: E$216.5 E$292.1
S$526: E$216.4 E$293.1
S$527: E$216.3 E$294.1
S$528: E$216.2 E$295.1
S$529: E$216.1 E$296.1
S$530: E$244.K E$293.2
S$531: E$242.K E$294.2
S$532: E$222.K E$295.2
S$533: E$218.K E$296.2
S$534: E$215.10 E$297.2
S$535: E$215.9 E$298.2
S$536: E$215.8 E$299.2
S$537: E$215.7 E$300.2
S$538: E$215.6 E$301.2
S$539: E$215.5 E$302.2
S$540: E$215.4 E$303.2
S$541: E$215.3 E$304.2
S$542: E$215.1 E$215.2 E$281.K E$282.K E$283.K E$284.K E$285.K E$286.K E$287.K E$288.K
S$543: E$281.A E$297.1
S$544: E$282.A E$298.1
S$545: E$283.A E$299.1
S$546: E$284.A E$300.1
S$547: E$285.A E$301.1
S$548: E$286.A E$302.1
S$549: E$287.A E$303.1
S$550: E$288.A E$304.1
S$624: E$305.10 E$306.10 E$307.6
S$625: E$305.9 E$306.9 E$307.5
S$626: E$305.5 E$305.6 E$306.5 E$306.6 E$307.3
S$627: E$305.2 E$306.2 E$307.1
S$628: E$305.1 E$306.1
S$631: E$305.7 E$305.8 E$306.7 E$306.8 E$307.4
S$632: E$305.3 E$305.4 E$306.3 E$306.4 E$326.1 E$327.1 E$328.1 E$329.1 E$330.1 E$331.1 E$332.1 E$333.1
S$633: E$309.8 E$325.C
S$634: E$309.7 E$324.C
S$635: E$309.6 E$323.C
S$636: E$309.5 E$322.C
S$637: E$309.4 E$321.C
S$638: E$309.3 E$320.C
S$639: E$309.2 E$319.C
S$640: E$309.1 E$318.C
S$641: E$325.A E$326.2
S$642: E$324.A E$327.2
S$643: E$323.A E$328.2
S$644: E$322.A E$329.2
S$645: E$321.A E$330.2
S$646: E$320.A E$331.2
S$647: E$319.A E$332.2
S$648: E$318.A E$333.2
S$649: E$317.A E$334.2
S$650: E$316.A E$335.2
S$651: E$315.A E$336.2
S$652: E$314.A E$337.2
S$653: E$313.A E$338.2
S$654: E$312.A E$339.2
S$655: E$311.A E$340.2
S$656: E$310.A E$341.2
S$657: E$308.10 E$310.C
S$658: E$308.9 E$311.C
S$659: E$308.8 E$312.C
S$660: E$308.7 E$313.C
S$661: E$308.6 E$314.C
S$662: E$308.5 E$315.C
S$663: E$308.4 E$316.C
S$664: E$308.3 E$317.C
S$665: E$308.1 E$308.2 E$334.1 E$335.1 E$336.1 E$337.1 E$338.1 E$339.1 E$340.1 E$341.1
S$739: E$342.2 E$343.2
S$740: E$342.1 E$343.1
S$743: E$342.3 E$342.4 E$343.3 E$343.4 E$344.1 E$344.2
S$744: E$345.1 E$346.1
S$745: E$345.2 E$346.2
SCL: E$20.14 E$62.12 E$223.3
SCL1: E$23.6 E$33.12
SCL2: E$117.1 E$119.6
SCL3: E$126.3 E$163.2 E$207.6
SCL4: E$213.14 E$214.10 E$217.14
SCL5: E$342.10 E$343.10 E$344.6
SCL6: E$345.10 E$346.10 E$347.6
SDA: E$20.13 E$62.13 E$223.2
SDA1: E$23.5 E$33.13
SDA2: E$117.2 E$119.5
SDA3: E$213.13 E$214.9 E$217.13
SDA4: E$342.9 E$343.9 E$344.5
SDA5: E$345.9 E$346.9 E$347.5
VCC: E$9.1 E$20.11 E$20.12 E$62.9 E$64.1 E$65.1 E$66.1 E$67.10 E$67.15 E$68.10 E$68.15 E$69.1 E$70.1 E$83.2 E$84.2 E$169.4 E$185.1 E$219.3 E$219.4 E$220.2 E$221.2 E$223.5 E$224.2 E$225.2 E$226.2 E$227.4 E$243.1 E$245.4 E$261.1 E$263.4 E$279.1
VCC1: E$164.4 E$192.2 E$208.2

## Tracks (layer width: path | path; a pad name or v marks a point on that pad's centre or on a via)
3V1  (via drill 0.5)
  Top 0.406: E$122.1 E$121.1 E$120.1 v209.23,33.02 | E$124.+ 194.18,50.35 193.68,49.85 E$117.18 191.77,50.02 191.77,50.48 191.13,51.12 171.13,51.12 170.18,50.16 170.18,44.45 171.13,43.5 E$119.4 173.35,44.77 177.16,44.77 177.48,44.45 E$123.2
  Bottom 0.406: v209.23,33.02 177.16,33.02 176.53,33.66 176.53,44.45 176.21,44.77 173.35,44.77 E$119.4
3V2
  Top 0.406: E$344.4 179.39,116.84 178.12,118.11 E$343.7
  Bottom 1.016: E$342.7 E$342.8 E$343.7 E$343.8
3V3  (via drill 0.5)
  Top 0.406: E$51.1 E$48.1 137.48,37.47 v137.16,37.78 E$33.9 137.16,45.09 138.11,46.04 E$36.1 E$37.1 E$35.1 E$36.1 | E$103.2 v119.7,60.64 E$39.10 119.7,63.82 120.02,64.14 125.73,64.14 126.05,63.82 E$39.15 126.05,60.33 126.68,59.69 139.38,59.69 140.02,60.33 E$38.10 140.02,63.82 140.34,64.14 146.05,64.14 146.37,63.82 E$38.15 146.37,60.64 146.69,60.33 E$104.2
  Bottom 0.406: v137.16,37.78 113.67,37.78 112.71,38.73 112.71,43.5 | v119.7,60.64 113.35,60.64 112.71,60.01 112.71,43.5 | 112.71,43.5 E$23.4
3V4
  Top 0.813: E$345.7 240.98,118.11 241.94,117.16 E$347.4
  Bottom 1.016: E$345.8 E$345.7 E$346.8 E$346.7
5V
  Top 0.61: E$119.2 E$119.1 174.62,38.1 175.58,37.15 201.61,37.15 202.88,38.42 E$118.10
  Bottom 0.61: 191.77,27.62 181.93,27.62 181.29,28.26 E$115.P$1 181.29,30.8 180.34,31.75 175.26,31.75 174.62,32.38 E$119.1 | 191.77,27.62 202.88,27.62 | 202.88,27.62 213.04,27.62 213.68,28.26 E$114.P$1 215.26,31.11 215.26,58.1 214,59.37 205.74,59.37 | E$113.P$1 202.88,27.62 | E$116.P$1 192.09,27.94 191.77,27.62 | E$109.P$1 173.35,58.74 173.99,59.37 184.15,59.37 | 184.15,59.37 194.94,59.37 | 194.94,59.37 205.74,59.37 | E$108.P$1 184.15,59.37 | E$111.P$1 194.94,59.37 | E$110.P$1 205.74,59.37
5V1
  Bottom 1.016: E$345.4 E$345.3 E$346.4 E$346.3
+5V  (via drill 0.5)
  Top 0.813: v15.56,37.15 v15.56,38.1 | v15.56,40.96 v15.56,41.91
  Top 1.016: E$20.8 E$20.7 v15.56,41.91 | E$8.2 E$4.6 | E$16.+ 28.57,37.15 E$18.+ v15.56,37.15
  Bottom 1.016: E$16.+ 33.66,37.15 42.86,37.15 | 42.86,37.15 43.18,37.15 44.13,36.2 E$8.2 | E$17.A 44.13,41.59 43.18,40.64 43.18,37.47 42.86,37.15 | v15.56,41.91 v15.56,40.96 v15.56,38.1 v15.56,37.15
GND  (via drill 0.5)
  Top 0.305: E$221.1 E$220.1 | E$219.2 56.52,49.85 | 56.52,49.85 58.42,49.85 59.05,50.48 E$220.1 | E$220.1 | 56.52,49.85 54.61,49.85 53.98,50.48 E$184.1 53.02,51.44 52.7,51.75 52.7,56.83 53.02,57.15 v53.98,57.15 | v20.64,49.53 E$9.2 25.4,49.53 25.76,49.17 E$223.4 25.76,45.76 25.4,45.4 25.4,40.96 25.72,40.64 32.07,40.64 32.7,41.27 32.7,47.94 | 32.7,47.94 32.7,49.85 32.57,49.98 E$7.2 | E$1.2 32.52,47.76 32.7,47.94
  Top 0.406: E$251.2 E$250.1 E$249.1 v23.81,76.52 | v29.21,66.99 30.16,66.99 30.48,67.31 E$257.2 E$253.2 32.38,69.22 32.7,69.53 32.7,74.93 32.38,75.25 E$252.1 | v23.81,76.52 | E$245.11 v25.08,71.75 | v23.5,57.15 E$258.1 E$261.2 | E$269.2 E$268.1 E$267.1 39.05,75.25 v39.69,75.25 | v44.45,66.99 45.4,66.99 45.72,67.31 E$275.2 E$271.2 47.62,69.22 47.94,69.53 47.94,74.93 47.62,75.25 E$270.1 | E$263.11 v40.32,71.75 | v38.73,57.15 E$276.1 E$279.2 | E$175.2 E$174.1 E$173.1 54.29,75.25 v54.93,75.25 | v59.69,66.99 60.64,66.99 60.96,67.31 E$181.2 E$177.2 62.87,69.22 63.18,69.53 63.18,74.93 62.87,75.25 E$176.1 | E$169.11 v55.56,71.75 | v53.98,57.15 E$182.1 E$185.2 | E$233.2 E$232.1 E$231.1 v8.57,76.52 | v13.97,66.99 14.92,66.99 15.24,67.31 E$239.2 E$235.2 17.14,69.22 17.46,69.53 17.46,74.93 17.14,75.25 E$234.1 | v8.57,76.52 | E$227.11 v9.84,71.75 | v8.26,57.15 E$240.1 E$243.2 | v19.37,53.98 v19.37,57.15 | E$62.10 v80.33,38.73 87.31,38.73 | E$52.9 v67.63,38.73 | 87.31,38.73 100.01,38.73 100.97,39.69 E$63.1 E$63.2 E$63.3 100.97,47.31 100.01,48.26 99.06,48.26 | 87.31,38.73 E$69.2 E$70.2 | E$83.1 v66.36,57.15 E$68.9 66.36,64.14 67.31,65.09 74.3,65.09 75.25,64.14 E$68.16 75.25,60.96 75.56,60.64 80.33,60.64 80.64,60.96 E$67.9 80.64,64.14 81.6,65.09 88.58,65.09 89.53,64.14 E$67.16 89.53,61.28 90.49,60.33 E$84.1 90.49,48.9 91.12,48.26 99.06,48.26 | E$68.8 66.36,66.67 66.67,66.36 68.9,66.36 | E$68.6 68.9,66.36 | 68.9,66.36 71.44,66.36 | E$68.4 71.44,66.36 | 71.44,66.36 73.98,66.36 | E$68.2 73.98,66.36 | 73.98,66.36 80.64,66.36 | E$67.8 80.64,66.36 | 80.64,66.36 83.19,66.36 | E$67.6 83.19,66.36 | 83.19,66.36 85.72,66.36
  Top 0.406: E$67.4 85.72,66.36 | 85.72,66.36 88.27,66.36 | E$67.2 88.27,66.36 | 88.27,66.36 v97.79,66.36 | E$13.1 35.24,18.73 | E$2.2 E$2.1 99.06,48.26 | E$12.2 35.56,33.34 34.92,32.7 E$5.1 34.92,31.11 35.24,30.8 35.24,25.4 | E$221.1
  Top 0.61: E$20.9 14.29,44.45 19.37,49.53 v20.64,49.53 | E$6.9 v9.84,24.13
  Top 1.016: E$16.- 26.04,25.4 35.24,25.4 | E$4.4 35.24,25.4 | 35.24,25.4 35.24,18.73 E$14.- E$15.- | E$20.10 E$20.9
  Bottom 0.406: v23.81,76.52 25.08,76.52 v25.08,71.75 25.08,66.99 | 25.08,66.99 v29.21,66.99 | v23.5,57.15 23.5,65.41 25.08,66.99 | v39.69,75.25 39.69,73.34 40.32,72.71 v40.32,71.75 40.32,66.99 | 40.32,66.99 v44.45,66.99 | v38.73,57.15 38.73,65.41 40.32,66.99 | v23.5,57.15 v38.73,57.15 | v54.93,75.25 54.93,73.34 55.56,72.71 v55.56,71.75 55.56,66.99 | 55.56,66.99 v59.69,66.99 | v53.98,57.15 53.98,65.41 55.56,66.99 | v38.73,57.15 v53.98,57.15 | v8.57,76.52 9.84,76.52 v9.84,71.75 9.84,66.99 | 9.84,66.99 v13.97,66.99 | 9.84,66.99 8.26,65.41 v8.26,57.15 v19.37,57.15 v23.5,57.15 | v20.64,49.53 19.37,49.53 v19.37,53.98 | v80.33,38.73 v67.63,38.73 | v53.98,57.15 v66.36,57.15
  Bottom 0.813: 97.81,66.38 v97.79,66.36 | E$82.A E$81.A E$80.A E$79.A E$71.A E$72.A E$73.A E$74.A 54.47,15.07 54.29,15.24 54.29,9.21 53.34,8.26 12.38,8.26 11.11,9.53 11.11,17.46 9.84,18.73 v9.84,24.13
  Bottom 1.016: E$10.1 97.81,66.38 | v97.79,66.36 99.69,66.36 100.97,65.09 100.97,49.53 97.47,46.04 97.47,38.73 95.25,36.51 55.56,36.51 54.29,35.24 54.29,17.14 | E$16.- 23.5,32.07 19.68,32.07 | 19.68,32.07 E$18.- | E$14.- 54.29,17.14 | 54.29,17.14 54.29,15.24 | 19.68,32.07 19.68,40.32 15.56,44.45 E$20.9 E$20.10
  other vias: 6.99,66.67 22.23,66.67 37.47,66.67 52.7,66.67 58.42,59.05 58.42,57.15 22.23,53.98 29.84,52.7 27.62,49.85 24.13,49.85 9.84,66.67 25.08,66.67 40.32,66.67 55.56,66.67 33.97,39.69 35.24,47.94 63.18,47.94 53.66,47.94 46.67,47.94 41.27,47.94 34.29,30.48 34.29,28.26 34.29,25.4 34.29,22.23 34.29,20.32 32.38,20.32 30.16,20.32 27.94,20.32 27.94,30.48 30.16,32.7 30.16,30.48 32.07,30.48 32.07,32.7 27.94,18.41 30.16,15.56 30.16,18.41 27.94,15.56 21.91,19.68 21.91,17.78 21.91,15.56 27.94,32.7 27.94,35.24 34.29,33.66 34.29,35.88 36.2,35.88 36.2,34.29 26.04,32.7 24.13,32.7 21.91,33.34 36.2,15.56 36.2,20.32 36.2,18.73 21.91,25.4 21.91,22.54 21.91,28.26 21.91,30.48 21.91,35.88 24.13,35.88 36.2,30.48 32.38,15.56 32.38,18.41
  pour Top (isolate 0.254): 0,83.19 45.4,83.19 45.4,79.38 55.56,79.38 57.78,77.15 63.82,77.15 63.82,47.31 34.61,47.31 34.61,39.05 19.37,39.05 19.37,52.7 0,52.7
  pour Bottom (isolate 0.254): 0,83.19 45.4,83.19 45.4,79.38 55.56,79.38 57.78,77.15 63.82,77.15 63.82,47.31 34.61,47.31 34.61,39.05 19.37,39.05 19.37,52.7 0,52.7
  pour Top (isolate 0.254): 33.66,14.61 21.27,14.61 21.27,37.15 36.83,37.15 36.83,14.61
  pour Bottom (isolate 0.254): 33.66,14.61 21.27,14.61 21.27,37.15 36.83,37.15 36.83,14.61
GND1  (via drill 0.5)
  Top 0.406: E$33.10 v138.43,38.73 145.41,38.73 | E$24.9 v125.73,38.73 | 145.41,38.73 158.12,38.73 159.07,39.69 E$34.1 E$34.2 E$34.3 159.07,52.39 158.12,53.34 E$106.1 E$106.2 | 145.41,38.73 E$48.2 E$51.2 | 118.43,57.15 E$39.9 118.43,64.14 119.38,65.09 126.36,65.09 127.32,64.14 E$39.16 127.32,60.96 127.64,60.64 138.43,60.64 138.75,60.96 E$38.9 138.75,64.14 139.7,65.09 146.69,65.09 147.64,64.14 E$38.16 147.64,61.28 148.59,60.33 E$104.1 | 118.43,57.15 118.43,44.13 117.79,43.5 E$23.3 | E$103.1 118.43,57.15
  Bottom 0.406: v138.43,38.73 v125.73,38.73 116.2,38.73 115.25,39.69 115.25,42.23 E$23.3
GND2  (via drill 0.5)
  Top 0.406: 180.97,39.69 179.07,39.69 | 179.07,39.69 178.75,39.69 | E$124.- v196.98,41.91 196.98,39.18 196.22,38.42 E$118.9 | v216.85,39.37 v214,39.37 | E$123.1 179.07,39.69
  Top 0.61: E$119.3 175.9,43.5 176.53,42.86 176.53,40.32 177.16,39.69 178.75,39.69 E$117.9 | 183.83,39.69 E$117.9 | E$117.9 188.59,39.69 189.87,38.42 E$118.9
  Bottom 0.406: E$125.3 E$125.2 E$125.1 v216.85,39.37 | v214,39.37 203.52,39.37 200.98,41.91 v196.98,41.91
GND3  (via drill 0.5)
  Top 0.305: E$163.10 237,22.4 236.54,22.86 E$190.- | E$163.10 237.85,20.68 v238.44,21.27 | E$163.10 236.27,20.68 235.9,20.32 E$191.1 235.9,16.19 235.59,15.88 232.41,15.88 231.78,16.51 231.78,18.73 232.23,19.18 E$163.4 | E$126.4 241.34,39.65 240.98,40.01 v239.71,40.01 239.08,40.01 238.12,39.05 E$202.2 235.9,39.05 235.27,39.69 E$203.2 | E$127.2 E$128.2 E$129.2 241.94,32.07 241.62,32.38 241.62,33.97 241.62,35.24 241.99,35.62 E$126.5 241.99,40.27 241.3,40.96 v240.66,40.96 E$202.1 E$203.1 | E$190.+ 232.09,22.73 232.09,20.95 232.36,20.68 E$163.1 233.63,20.68 234,20.32 E$191.2
  Top 0.406: E$186.1 242.89,25.4 v243.84,25.4 | E$187.1 244.47,25.4 v243.84,25.4 | E$164.11 v243.84,25.4 | E$192.1 250.19,21.27 v250.19,21.59 | E$146.2 E$145.2 | E$145.2 | E$145.2 251.78,52.7 251.78,52.39 251.46,52.07 E$144.1 E$143.1 v249.56,52.39 | E$156.1 E$155.1 E$158.2 E$157.2 E$131.11 v236.85,51.12 | E$194.A E$195.A E$197.A E$204.A E$196.A | E$196.A E$199.A E$198.A E$205.A | E$165.2 v235.27,12.38 | E$167.2 v241.3,13.97 | E$200.6 246.1,5.68 246.06,7.62 | 246.06,7.62 239.73,7.62 239.1,6.99 E$200.4 | E$200.8 253.1,6.93 252.41,7.62 | 252.41,7.62 246.06,7.62 | E$193.- 252.92,8.12 252.41,7.62 | E$207.3 234,32.7 234.95,31.75 234.95,22.99 E$190.- | E$131.4 v247.65,51.12 | 241.62,33.97 230.82,33.97 E$207.4 230.82,31.43 230.82,25.08 232.09,23.81 232.09,23.05 E$190.+ | E$196.A 240.99,70.79 240.98,70.8 v240.98,68.9
  Bottom 0.406: 243.84,22.23 239.4,22.23 v238.44,21.27 238.44,12.38 | 243.84,22.23 v243.84,25.4 | v250.19,21.59 249.56,22.23 243.84,22.23 | 240.98,55.88 237.49,55.88 236.85,55.24 v236.85,51.12 239.08,51.12 239.71,50.48 v239.71,40.01 | 240.98,55.88 248.92,55.88 249.56,55.24 v249.56,52.39 256.86,52.39 257.49,51.75 E$206.2 E$206.1 | v241.3,13.97 239.71,12.38 239.08,12.38 | 239.08,12.38 238.44,12.38 | 238.44,12.38 v235.27,12.38 233.04,12.38 232.1,11.44 E$200.2 | E$200.4 239.1,12.36 239.08,12.38 | E$207.3 240.66,32.7 241.62,33.66 241.62,40.01 v240.66,40.96 240.66,50.48 241.3,51.12 v247.65,51.12 | v240.98,68.9 240.98,55.88
  other vias: 245.75,36.2 229.55,58.42 236.54,62.55 236.22,54.93 229.55,54.61 232.09,47.94 238.12,46.04 247.01,46.04 247.33,37.78 248.6,54.61 244.79,63.5 253.68,63.82 228.6,43.5 242.57,56.52 240.98,63.5 240.03,46.04
  pour Top (isolate 0.254): 226.69,85.09 258.44,85.09 258.44,44.13 247.97,44.13 247.97,35.24 226.38,35.24 226.38,85.09
  pour Bottom (isolate 0.254): 226.69,85.09 258.44,85.09 258.44,44.13 247.97,44.13 247.97,35.24 226.38,35.24 226.38,85.09
  pour Top (isolate 0.254): 226.69,26.35 258.44,26.67 258.44,2.86 226.69,2.86
  pour Bottom (isolate 0.254): 226.69,26.35 258.44,26.67 258.44,2.86 226.69,2.86
GND4
  Top 0.406: E$344.3 178.12,102.23 178.12,105.09 177.16,106.05 174.31,106.05 173.04,107.31 173.04,114.3 E$343.6
  Bottom 1.016: E$342.5 E$342.6 E$343.5 E$343.6
GND5
  Top 0.813: E$347.3 241.94,97.16 242.57,96.52 245.75,96.52 247.01,97.79 247.01,114.94 247.65,115.57 E$346.6
  Bottom 1.016: E$346.5 E$346.6 E$345.5 E$345.6
IN1+  (via drill 0.5)
  Top 0.406: E$160.2 230.82,63.5 E$139.1 | E$201.8 232.04,81.33 232.09,81.28 232.09,79.69 232.41,79.38 E$195.C 232.1,75.58 v232.09,74.3
  Bottom 0.406: v232.09,74.3 231.78,73.66 231.78,69.53 229.87,67.63 229.87,66.36 E$139.1
IN1-  (via drill 0.5)
  Top 0.406: E$159.2 229.24,45.09 228.6,45.72 v228.6,59.69 E$142.2 | E$201.9 228.54,75.95 E$194.C 228.61,75.58 v228.6,74.3 | E$212.2 v228.6,68.58
  Bottom 0.406: v228.6,74.3 v228.6,68.58 v228.6,59.69
IN2+  (via drill 0.5)
  Top 0.406: E$201.7 235.54,80.6 235.59,80.33 235.59,79.69 236.22,79.06 E$197.C v236.22,74.3 | E$138.1 233.36,62.23 E$153.2
  Bottom 0.406: v236.22,74.3 236.22,70.17 237.49,68.9 237.49,66.36 E$138.1
IN2-  (via drill 0.5)
  Top 0.406: E$201.6 239.04,80.68 239.08,80.33 239.08,79.69 240.03,78.74 E$204.C v240.03,74.3 | E$154.2 239.4,61.91 238.76,62.55 v238.76,63.5 E$141.2 E$211.2
  Bottom 0.406: v240.03,74.3 240.03,70.17 238.76,68.9 v238.76,63.5
IN3+  (via drill 0.5)
  Top 0.406: E$148.2 251.78,62.23 251.14,62.87 249.56,62.87 E$137.1 | E$201.4 246.06,79.69 247.63,78.12 247.63,76.55 E$199.C v247.65,74.3
  Bottom 0.406: E$137.1 246.06,66.36 246.06,67.94 247.65,69.53 v247.65,74.3
IN3-  (via drill 0.5)
  Top 0.406: E$147.2 243.84,60.96 242.89,61.91 v242.89,63.5 E$140.2 E$210.2 | E$201.5 242.57,79.69 243.81,78.45 243.81,76.24 E$196.C v243.84,74.3
  Bottom 0.406: v243.84,74.3 243.84,70.17 242.89,69.22 v242.89,63.5
IN4+  (via drill 0.5)
  Top 0.406: E$130.1 253.37,62.87 E$135.2 | E$201.3 249.54,79.7 251.46,77.79 251.45,76.22 E$198.C v251.46,74.3
  Bottom 0.406: v251.46,74.3 251.46,69.22 249.87,67.63 249.87,66.36 E$130.1
IN4-  (via drill 0.5)
  Top 0.406: E$136.2 254.32,45.09 254.63,45.4 254.63,53.02 254.95,53.34 v254.95,63.5 E$133.2 E$209.2 | E$201.2 253.05,79.69 255.26,77.47 E$205.C v255.27,74.3
  Bottom 0.406: v255.27,74.3 255.27,73.66 254.95,73.34 v254.95,63.5
INT1
  Top 0.406: E$33.20 137.16,46.99 135.57,45.4 120.33,45.4 119.7,44.77 119.7,41.59 119.06,40.96 E$23.1
POWER_GND  (via drill 0.5)
  Top 0.406: E$39.8 118.43,66.67 118.75,66.36 120.97,66.36 | 120.97,66.36 123.51,66.36 | 123.51,66.36 126.05,66.36 | 126.05,66.36 138.75,66.36 | 138.75,66.36 141.29,66.36 | 141.29,66.36 143.83,66.36 | 143.83,66.36 146.37,66.36 | 146.37,66.36 v155.89,66.36 | E$38.2 146.37,66.36 | E$38.4 143.83,66.36 | E$38.6 141.29,66.36 | E$38.8 138.75,66.36 | E$39.2 126.05,66.36 | E$39.4 123.51,66.36 | E$39.6 120.97,66.36
  Bottom 0.813: E$22.1 155.89,81.06 v155.89,66.36 158.12,66.36 159.07,65.41 159.07,49.53 155.89,46.35 155.89,38.1 153.35,35.56 113.67,35.56 112.39,34.29 112.39,16.51 113.84,15.07 E$95.A E$94.A E$93.A E$75.A E$99.A E$100.A E$101.A E$102.A
S$8
  Top 0.406: E$10.9 57.17,79.67 57.78,79.06 62.87,79.06 67.63,74.3 E$85.2
S$11
  Top 0.406: E$171.1 | E$171.1 | E$171.1 E$172.1 56.83,76.2 55.56,77.47 44.45,77.47 43.18,78.74 E$53.1
S$26
  Top 0.61: E$6.11 11.11,9.53 10.16,8.57 5.4,8.57 4.74,7.92 E$11.1
S$27
  Top 0.61: E$6.12 12.38,8.26 13.63,7.01 E$11.3
S$28
  Top 0.61: E$11.5 25.06,7.96 24.45,8.57 14.61,8.57 13.65,9.53 E$6.13
S$29
  Top 0.61: E$11.7 35.22,8.59 33.97,9.84 15.88,9.84 14.92,10.79 E$6.14
S$34
  Top 0.305: E$223.8 28.5,46.86 E$1.1 E$224.1
  Top 0.406: E$224.1
S$35
  Top 0.406: E$20.3 10.48,36.83 13.65,33.66 E$6.6
S$36
  Top 0.406: E$20.4 4.76,38.1 10.79,38.1 14.92,33.97 E$6.5
S$37
  Top 0.406: E$6.7 12.38,33.34 10.16,35.56 4.76,35.56 E$20.2
S$38
  Top 0.406: E$6.8 11.11,33.02 9.84,34.29 E$20.1
S$39
  Top 0.406: E$10.8 63.2,81.26 70.17,74.3 E$86.2
S$40
  Top 0.406: E$87.2 72.71,74.3 67.31,79.69 67.31,81.23 E$10.7
S$41
  Top 0.406: E$88.2 75.25,74.3 72.39,77.15 72.39,81.23 E$10.6
S$42
  Top 0.406: E$89.2 81.92,74.3 77.47,78.74 77.47,81.23 E$10.5
S$43
  Top 0.406: E$90.2 84.45,74.3 82.55,76.2 82.55,81.23 E$10.4
S$44
  Top 0.406: E$91.2 87,74.3 87.63,74.93 87.63,81.23 E$10.3
S$45
  Top 0.406: E$92.2 89.53,74.3 92.71,77.47 92.71,81.23 E$10.2
S$46
  Top 0.406: E$68.7 E$85.1
S$81  (via drill 0.5)  (1 unrouted)
  Top 0.406: E$52.10 65.9,27.16 65.72,27.3 64.45,27.3 63.82,27.94 E$49.1 E$55.1 E$56.1 E$57.1 v62.55,34.92 | E$61.2 E$60.2 E$59.2 E$58.2 v82.87,34.92 | E$13.2 42.86,18.73
  Top 0.61: v59.05,18.1 E$54.3 v59.05,22.54 | v61.59,18.1 E$54.1 v61.59,22.54 | v69.22,18.1 E$78.3 v69.22,22.54 | v71.75,18.1 E$78.1 v71.75,22.54 | v79.38,18.1 E$76.3 v79.38,22.54 | 81.6,18.1 81.92,18.41 E$76.1 v81.92,22.54 | 89.85,18.1 89.53,18.41 E$77.3 v89.53,22.54 | v92.08,18.1 E$77.1 v92.08,22.54 | E$11.8 40.3,6.01 40.32,6.03 | v9.84,14.29 E$6.10
  Top 1.016: 40.32,6.03 40.32,12.06 | E$4.2 42.23,22.86 42.86,22.23 42.86,18.73 42.86,12.06
  Top 1.27: 89.85,18.1 v89.53,18.1 | v81.92,18.1 81.6,18.1 | v59.05,18.1 55.88,18.1 55.24,17.46 55.24,13.02 54.29,12.06 42.86,12.06 40.32,12.06 E$14.+ E$15.+